# EAGLE board deltabot-heater-bed (EAGLE 6.2)
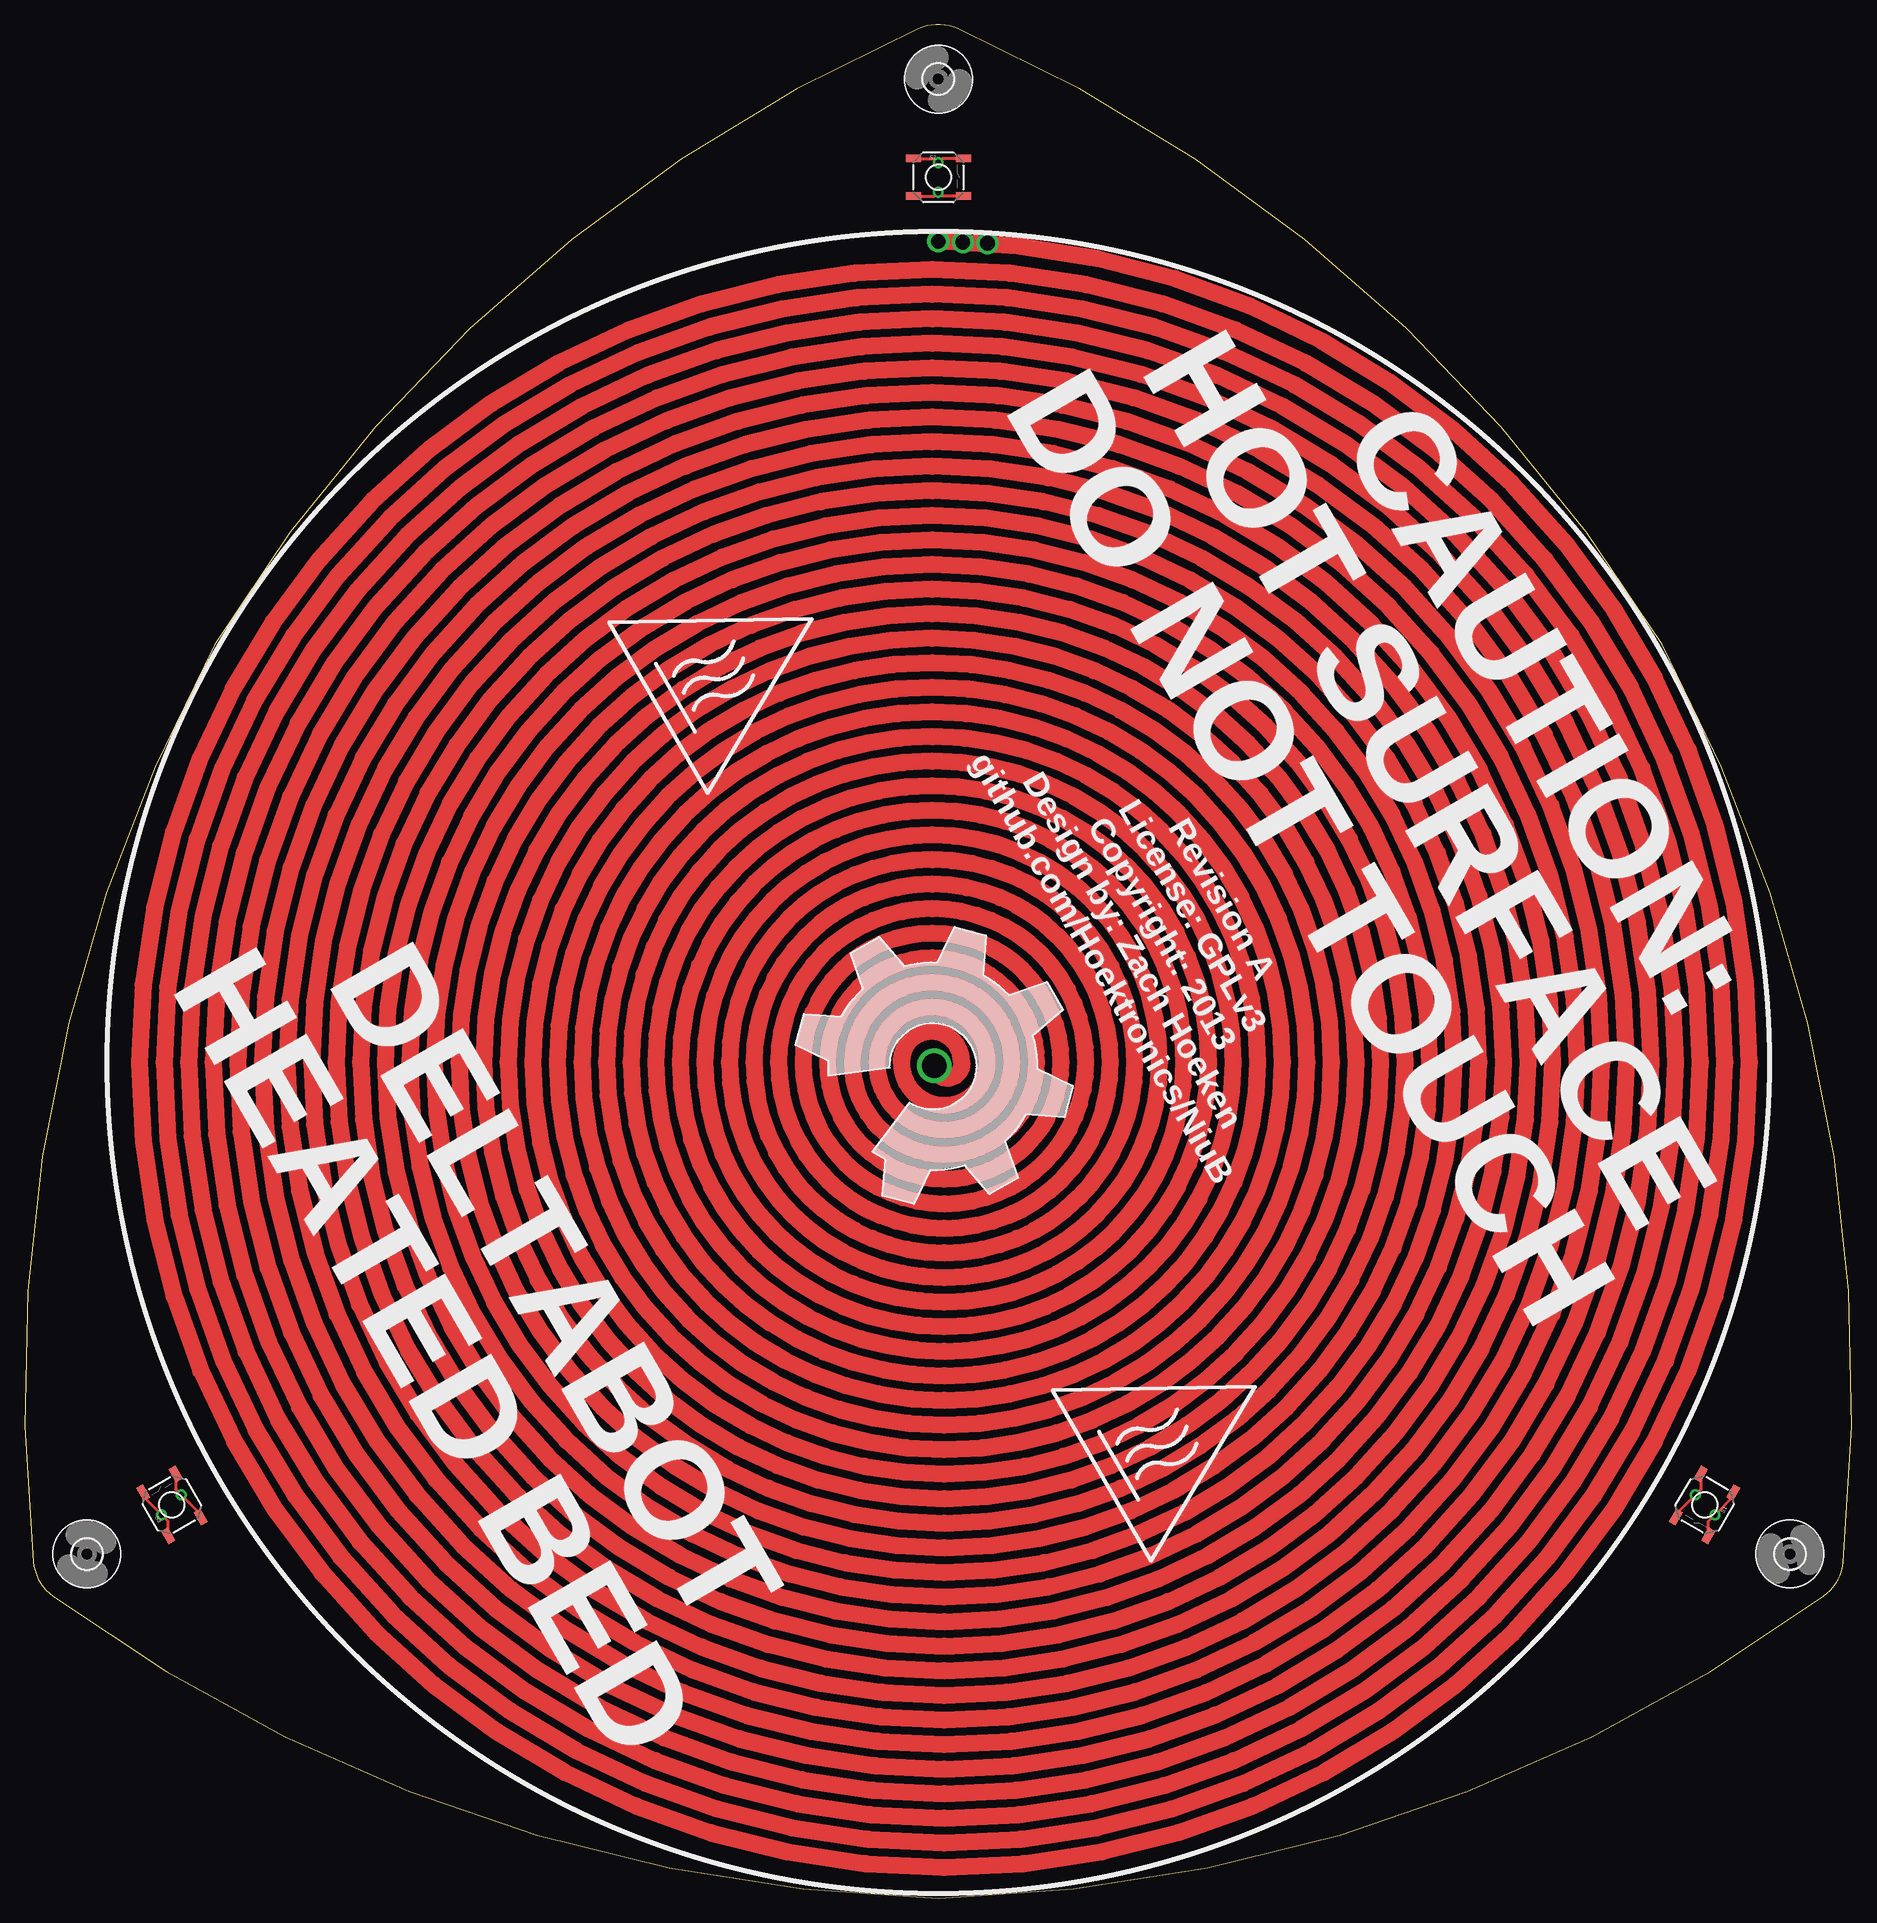
[diagram p0: board, top side]
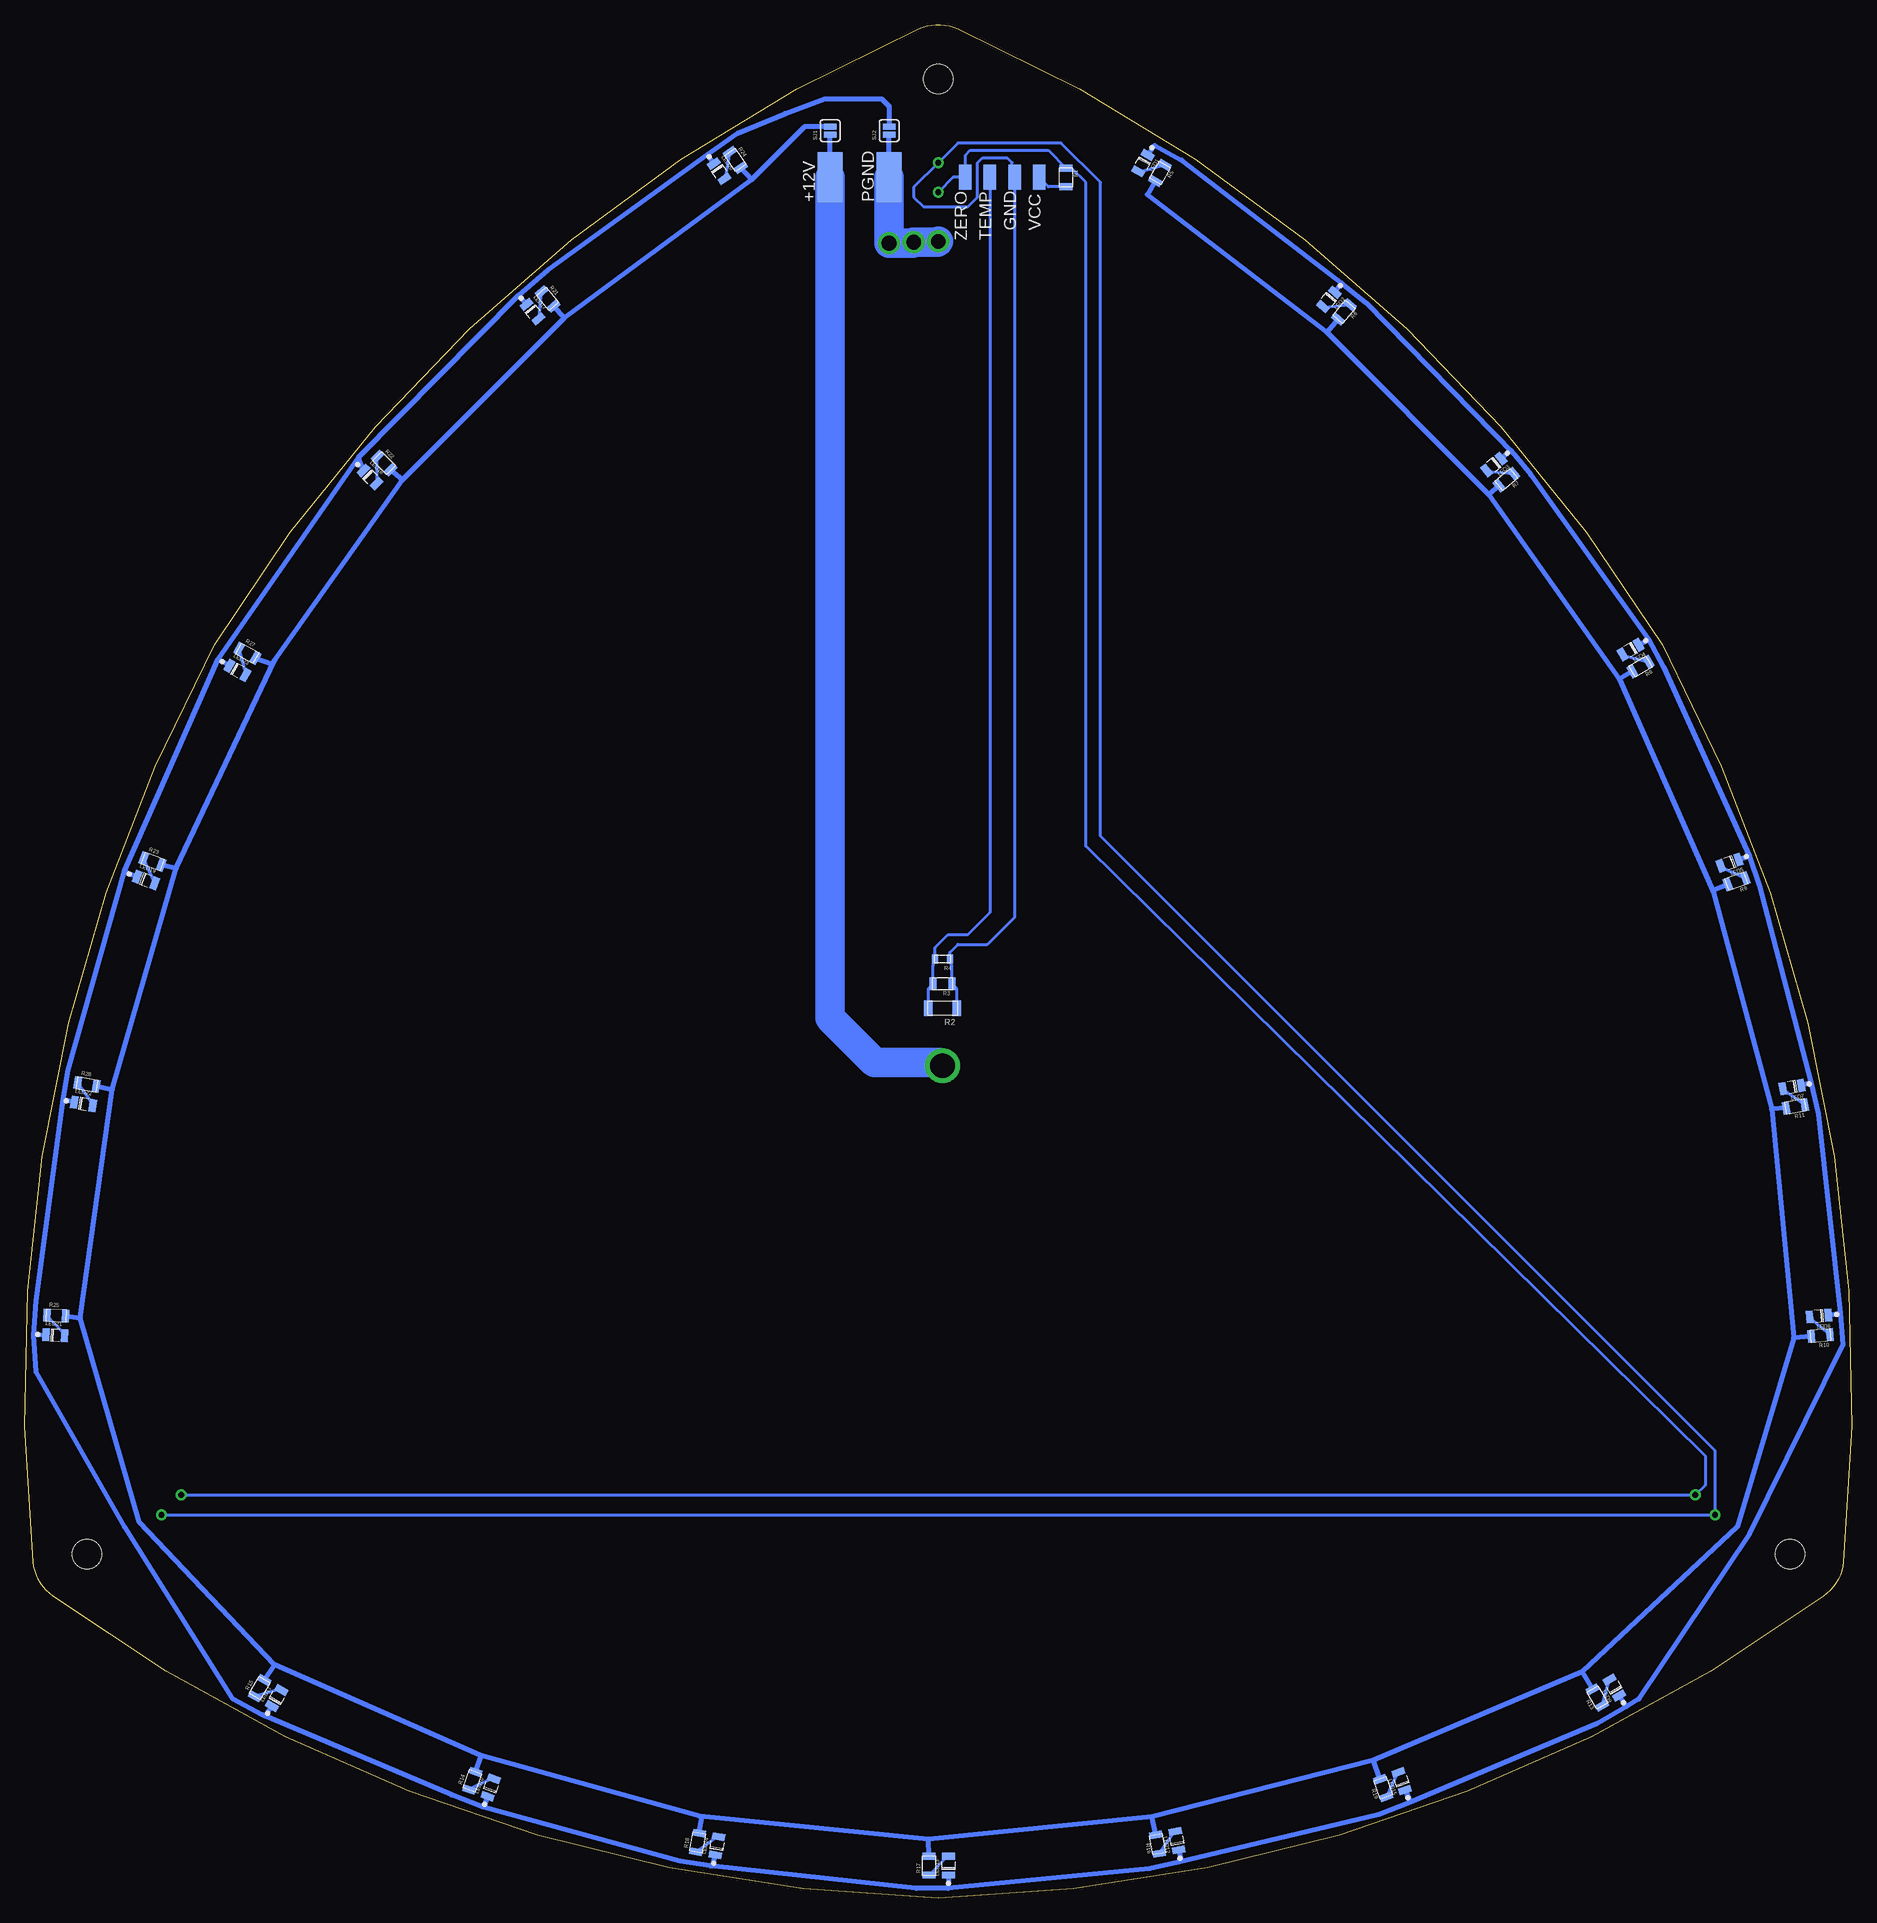
[diagram p1: board, bottom side, seen from below]

Size 185.85 x 190.54 mm. Coordinates in mm from the lower left corner, seen from the top.
Outline: 19.31,127.5 arc35 0.88,34.19
Outline: 2.9,30.69 arc35 92.93,0
Outline: 0.88,34.19 arc48 2.9,30.69
Outline: 166.54,127.5 arc35 94.95,190.12
Outline: 90.9,190.12 arc35 19.31,127.5
Outline: 94.95,190.12 arc48 90.9,190.12
Outline: 184.97,34.19 arc35 166.54,127.5
Outline: 92.93,0 arc35 182.95,30.69
Outline: 182.95,30.69 arc48 184.97,34.19
Outline: 19.31,127.5 arc35 0.88,34.19
Outline: 2.9,30.69 arc35 92.93,0
Outline: 0.88,34.19 arc48 2.9,30.69
Outline: 166.54,127.5 arc35 94.95,190.12
Outline: 90.9,190.12 arc35 19.31,127.5
Outline: 94.95,190.12 arc48 90.9,190.12
Outline: 184.97,34.19 arc35 166.54,127.5
Outline: 92.93,0 arc35 182.95,30.69
Outline: 182.95,30.69 arc48 184.97,34.19
Copper layers (1*16): Top 0.035mm / dielectric 1.5mm / Bottom 0.035mm
Design rules: minimum track width 8mil, minimum drill 20mil, track to track 8mil, track to pad 8mil, pad to pad 8mil, via to via 8mil, smd to smd 8mil, copper to edge 10mil, drill to drill 8mil, minimum pad ring 12mil, minimum via ring 10mil, stop-mask expansion 4mil, vias tented up to drill 100mil, thermal gap 10mil

## Footprints (pad centres in the part's own frame; a part is rotated, then mirrored left to right if it is on the bottom)
SMD2,54-5,08 = smd 2.54 x 5.08: 1 0,0
SMD1,27-2,54 = smd 1.27 x 2.54: 1 0,0
3,0 = hole 3: 0,0
0805-LED = smd 0.7 x 1.3: A 0.95,0; C -0.95,0
0805-RC = smd 0.7 x 1.3: 1 -0.95,0; 2 0.95,0
1206-RC = smd 0.9 x 1.6: 1 -1.45,0; 2. 1.45,0
0603-RC = smd 0.6 x 0.9: 1 -0.75,0; 2 0.75,0
TACTILE_SWITCH_SMD = smd 1.524 x 0.762: 1 -2.54,1.905; 2 2.54,1.905; 3 -2.54,-1.905; 4 2.54,-1.905
SJ_2S = smd 0.635 x 1.27: 1 -0.412,0; 2 0.412,0

## Placement (x,y rotation side)
+12V  WIREPADSMD2,54-5,08  [SMD2,54-5,08]  103.93,175 0 bottom
GND  [SMD1,27-2,54]  85.18,175 0 bottom
H1  MOUNT-HOLE3.0  [3,0]  179.53,35 330 top
H2  MOUNT-HOLE3.0  [3,0]  6.32,35 210 top
H3  MOUNT-HOLE3.0  [3,0]  92.93,185 90 top
LED1  [0805-LED]  72.1,176.45 240 bottom
LED2  [0805-LED]  53.19,162.6 230 bottom
LED3  [0805-LED]  36.43,145.8 220 bottom
LED4  [0805-LED]  22.51,126.98 210 bottom
LED5  [0805-LED]  12.44,105.3 200 bottom
LED6  [0805-LED]  3.36,59.2 185 bottom
LED7  [0805-LED]  6.1,82.48 190 bottom
LED9  [0805-LED]  24.17,21.41 120 bottom
LED10  [0805-LED]  138.44,11.25 70 bottom
LED11  [0805-LED]  160.22,20.35 60 bottom
LED12  [0805-LED]  68.65,5.84 100 bottom
LED13  [0805-LED]  91.88,3.3 90 bottom
LED14  [0805-LED]  115.44,5.33 80 bottom
LED15  [0805-LED]  45.8,11.89 110 bottom
LED17  [0805-LED]  134.19,161.36 310 bottom
LED18  [0805-LED]  150.71,144.53 315 bottom
LED19  [0805-LED]  173.52,103.54 340 bottom
LED20  [0805-LED]  115.21,175.63 305 bottom
LED21  [0805-LED]  182.72,57.25 357.5 bottom
LED22  [0805-LED]  179.86,80.77 350 bottom
LED23  [0805-LED]  164.21,124.87 330 bottom
LOGO1  OSHW_LOGO_FILLX1000-NT  [OSHW_FILLX1000_NOTEXT]  75.72,91.35 300 top
PGND  WIREPADSMD2,54-5,08  [SMD2,54-5,08]  97.93,175 0 bottom
R1  10k  [0805-RC]  79.93,175 270 bottom
R2  [1206-RC]  92.5,90.5 180 bottom
R3  [0805-RC]  92.5,93 180 bottom
R4  [0603-RC]  92.5,95.5 180 bottom
R5  [0805-RC]  70.37,175.45 240 bottom
R6  [0805-RC]  51.66,161.31 230 bottom
R7  [0805-RC]  35.14,144.27 220 bottom
R8  [0805-RC]  21.51,125.24 210 bottom
R9  [0805-RC]  11.75,103.42 200 bottom
R10  [0805-RC]  3.19,57.21 185 bottom
R11  [0805-RC]  5.75,80.52 190 bottom
R13  [0805-RC]  25.9,20.41 120 bottom
R14  [0805-RC]  140.32,11.94 70 bottom
R15  [0805-RC]  161.95,21.35 60 bottom
R16  [0805-RC]  70.62,5.49 100 bottom
R17  [0805-RC]  93.88,3.3 90 bottom
R18  [0805-RC]  117.41,5.67 80 bottom
R19  [0805-RC]  47.68,11.2 110 bottom
R21  [0805-RC]  132.66,162.64 310 bottom
R22  [0805-RC]  149.3,145.94 315 bottom
R23  [0805-RC]  172.84,105.42 340 bottom
R24  [0805-RC]  113.57,176.78 305 bottom
R25  [0805-RC]  182.63,59.25 357.5 bottom
R26  [0805-RC]  179.51,82.74 350 bottom
R27  [0805-RC]  163.21,126.6 330 bottom
S1  [TACTILE_SWITCH_SMD]  170.87,40 240 top
S2  [TACTILE_SWITCH_SMD]  92.93,175 0 top
S3  [TACTILE_SWITCH_SMD]  14.98,40 120 top
SJ1  SOLDERJUMPERNC  [SJ_2S]  103.93,179.75 90 bottom
SJ2  SOLDERJUMPERNC  [SJ_2S]  97.93,179.75 90 bottom
TEMP  [SMD1,27-2,54]  87.68,175 0 bottom
VCC  [SMD1,27-2,54]  82.68,175 0 bottom
ZERO  [SMD1,27-2,54]  90.18,175 0 bottom

## Library data of the parts
+12V GND PGND TEMP VCC ZERO = wirepad
H1-H3 = holes
LED1-LED7 LED9-LED15 LED17-LED23 R1-R11 R13-R19 R21-R27 = Hoektronics
LOGO1 = ohw-logo
S1-S3 = SparkFun-Electromechanical; PROD_ID: SWCH-08247
SJ1 SJ2 = SparkFun-Passives

## Nets
12V: R5.2 R6.2 R7.2 R8.2 R9.2 R10.2 R11.2 R13.2 R14.2 R15.2 R16.2 R17.2 R18.2 R19.2 R21.2 R22.2 R23.2 R24.2 R25.2 R26.2 R27.2 SJ1.2
GND: GND.1 R2.1 R3.1 R4.1 S1.1 S1.2 S2.1 S2.2 S3.1 S3.2
HEATER: +12V.1 PGND.1 SJ1.1 SJ2.1
N$1: R2.2. R3.2 R4.2 TEMP.1
N$2: LED1.A R5.1
N$3: LED2.A R6.1
N$4: R1.1 S1.3 S1.4 S2.3 S2.4 S3.3 S3.4 ZERO.1
N$5: LED3.A R7.1
N$6: LED4.A R8.1
N$7: LED5.A R9.1
N$8: LED6.A R10.1
N$9: LED7.A R11.1
N$11: LED9.A R13.1
N$12: LED10.A R14.1
N$13: LED11.A R15.1
N$14: LED12.A R16.1
N$15: LED13.A R17.1
N$16: LED14.A R18.1
N$17: LED15.A R19.1
N$19: LED17.A R21.1
N$20: LED18.A R22.1
N$21: LED19.A R23.1
N$22: LED20.A R24.1
N$23: LED21.A R25.1
N$24: LED22.A R26.1
N$25: LED23.A R27.1
PGND: LED1.C LED2.C LED3.C LED4.C LED5.C LED6.C LED7.C LED9.C LED10.C LED11.C LED12.C LED13.C LED14.C LED15.C LED17.C LED18.C LED19.C LED20.C LED21.C LED22.C LED23.C SJ2.2
VCC: R1.2 VCC.1

## Tracks (layer width: path | path; a pad name or v marks a point on that pad's centre or on a via)
12V
  Bottom 0.5: R24.2 111.93,174.75 | 111.93,174.75 130.93,160.75 | 130.93,160.75 R21.2 | R22.2 147.43,144.25 | 147.43,144.25 130.93,160.75 | R27.2 160.68,125.5 160.39,125.9 | 160.39,125.9 147.43,144.25 | R23.2 170.43,104.75 | 170.43,104.75 160.39,125.9 | R26.2 176.93,82.25 | 176.93,82.25 170.43,104.75 | R25.2 180.18,59 | 180.18,59 176.93,82.25 | R15.2 160.43,23.75 | 160.43,23.75 174.18,38.25 180.18,59 | R14.2 139.43,14.5 139.52,14.54 | 139.52,14.54 160.43,23.75 | R18.2 116.93,8.25 117.16,8.31 | 117.16,8.31 139.52,14.54 | R17.2 93.93,6 | 93.93,6 117.16,8.31 | R16.2 71.18,8.25 | 71.18,8.25 93.93,6 | R19.2 48.68,14 | 48.68,14 71.18,8.25 | R13.2 27.43,23 | 27.43,23 48.68,14 | R10.2 5.93,57 | 5.93,57 11.68,37.75 27.43,23 | R11.2 8.18,80.25 | 8.18,80.25 5.93,57 | R9.2 14.18,102.5 14.13,102.33 | 14.13,102.33 8.18,80.25 | R8.2 23.68,124 | 23.68,124 14.13,102.33 | R7.2 36.93,142.75 | 36.93,142.75 23.68,124 | R6.2 53.43,159.25 | 53.43,159.25 36.93,142.75 | R5.2 71.68,173.25 53.43,159.25 | 111.93,174.75 106.51,180.16 SJ1.2
GND  (via drill 0.6)
  Top 0.3: S1.1 173.79,40.86 v171.93,39 171.25,38.32 S1.2 | S3.1 14.6,38.32 v13.93,39 12.06,40.86 S3.2 | S2.2 93.33,176.91 v92.93,176.5 92.52,176.91 S2.1
  Bottom 0.3: R2.1 91.05,92.5 R3.1 91.55,94.8 R4.1 91.75,96.18 90.93,97 87.93,97 85.18,99.75 GND.1 85.43,175.75 85.43,176.5 85.93,177 88.43,177 88.93,176.5 88.93,173 89.93,172 94.43,172 95.43,173 95.43,174 v92.93,176.5 90.93,178.5 80.43,178.5 76.43,174.5 76.43,108 13.93,45.5 v13.93,39 v171.93,39
HEATER  (via drill 1.5 pad 2.25, 2.5 pad 3)
  Top 1.75: v92.93,168.5 arc-90 175.43,85 arc-180 11.68,85 arc-180 172.93,85 arc-180 14.18,85 arc-180 170.43,85 arc-180 16.68,85 arc-180 167.93,85 arc-180 19.18,85 arc-180 165.43,85 arc-180 21.68,85 arc-180 162.93,85 arc-180 24.18,85 arc-180 160.43,85 arc-180 26.68,85 arc-180 157.93,85 arc-180 29.18,85 arc-180 155.43,85 arc-180 31.68,85 arc-180 152.93,85 arc-180 34.18,85 arc-180 150.43,85 arc-180 36.68,85 arc-180 147.93,85 arc-180 39.18,85 arc-180 145.43,85 arc-180 41.68,85 arc-180 142.93,85 arc-180 44.18,85 arc-180 140.43,85 arc-180 46.68,85 arc-180 137.93,85 arc-180 49.18,85 arc-180 135.43,85 arc-180 51.68,85 arc-180 132.93,85 arc-180 54.18,85 arc-180 130.43,85 arc-180 56.68,85 arc-180 127.93,85 arc-180 59.18,85 arc-180 125.43,85 arc-180 61.68,85 arc-180 122.93,85 arc-180 64.18,85 arc-180 120.43,85 arc-180 66.68,85 arc-180 117.93,85 arc-180 69.18,85 arc-180 115.43,85 arc-180 71.68,85 arc-180 112.93,85 arc-180 74.18,85 arc-180 110.43,85 arc-180 76.68,85 arc-180 107.93,85 arc-180 79.18,85 arc-180 105.43,85 arc-180 81.68,85 arc-180 102.93,85 arc-180 84.18,85 arc-180 100.43,85 arc-180 86.68,85 arc-180 97.93,85 arc-180 89.18,85 arc-180 95.28,85.2 arc-190 92.43,84.75 92.5,84.68 v92.5,84.65
  Bottom 0.5: +12V.1 SJ1.1 | PGND.1 SJ2.1
  Bottom 3: PGND.1 v97.93,168.3 95.53,168.3 v95.43,168.4 93.03,168.4 v92.93,168.5 | +12V.1 103.93,89.5 99.43,85 92.85,85 v92.5,84.65
N$1
  Bottom 0.3: TEMP.1 87.68,100.25 89.93,98 91.93,98 93.25,96.68 R4.2 93.45,94.8 R3.2 93.95,92.5 R2.2.
N$2
  Bottom 0.3: LED1.A 72.49,175.58 R5.1
N$3
  Bottom 0.3: LED2.A 53.73,161.81 R6.1
N$4  (via drill 0.6)
  Top 0.3: 89.83,173.09 S2.3 92.52,173.09 v92.93,173.5 93.33,173.09 S2.4 | 170.49,43.56 S1.3 170.49,41.56 v169.93,41 167.95,39.02 S1.4 | S3.3 17.9,39.02 v15.93,41 15.36,41.56 S3.4
  Bottom 0.3: v169.93,41 v15.93,41 14.93,42 14.93,45 77.93,107 77.93,174.5 79.38,175.95 R1.1 81.73,177.75 89.68,177.75 90.18,177.25 ZERO.1 91.43,175 v92.93,173.5
N$5
  Bottom 0.3: LED3.A 37.09,145.11 R7.1
N$6
  Bottom 0.3: LED4.A 23.28,126.41 R8.1
N$7
  Bottom 0.3: LED5.A 13.3,104.89 R9.1
N$8
  Bottom 0.3: LED6.A 4.3,59.02 R10.1
N$9
  Bottom 0.3: LED7.A 7.02,82.22 R11.1
N$11
  Bottom 0.3: LED9.A 24.73,22.18 R13.1
N$12
  Bottom 0.3: LED10.A 138.2,12.18 R14.1
N$13
  Bottom 0.3: LED11.A 159.83,21.22 R15.1
N$14
  Bottom 0.3: LED12.A 68.91,6.76 R16.1
N$15
  Bottom 0.3: LED13.A 91.98,4.25 R17.1
N$16
  Bottom 0.3: LED14.A 115.37,6.28 R18.1
N$17
  Bottom 0.3: LED15.A 46.22,12.75 R19.1
N$19
  Bottom 0.3: LED17.A 133.5,160.69 R21.1
N$20
  Bottom 0.3: LED18.A 149.97,143.93 R22.1
N$21
  Bottom 0.3: LED19.A 172.59,103.31 R23.1
N$22
  Bottom 0.3: LED20.A 114.58,174.91 R24.1
N$23
  Bottom 0.3: LED21.A 181.77,57.31 R25.1
N$24
  Bottom 0.3: LED22.A 178.9,80.71 R26.1
N$25
  Bottom 0.3: LED23.A 163.33,124.48 R27.1
PGND
  Bottom 0.3: LED4.C 21.64,127.36
  Bottom 0.5: 116.43,177.3 LED20.C 116.33,177.2 | 116.43,177.3 113.33,179.5 108.53,181.5 104.43,183 98.68,183 97.93,182.25 SJ2.2 | LED17.C 135.63,163 | 135.63,163 132.63,165.6 116.43,177.3 | LED18.C 151.93,146.5 151.8,146.63 | 151.8,146.63 135.63,163 | LED23.C 166.18,126 | 166.18,126 151.8,146.63 | LED19.C 175.43,104.25 175.68,104.5 | 175.68,104.5 166.18,126 | LED22.C 181.93,81.25 | 181.93,81.25 181.43,84.25 175.68,104.5 | LED21.C 184.93,57.25 | 184.93,57.25 184.68,60.75 181.93,81.25 | LED11.C 161.43,18.5 161.71,18.65 | 161.71,18.65 164.68,20.25 175.68,37.75 184.68,53.5 184.93,57.25 | LED10.C 139.18,9.25 | 139.18,9.25 142.43,10.5 161.71,18.65 | LED14.C 115.93,3.25 116.13,3.28 | 116.13,3.28 119.18,3.75 139.18,9.25 | LED13.C 91.93,1 | 91.93,1 95.18,1 116.13,3.28 | LED12.C 68.18,3.75 68.52,3.67 | 68.52,3.67 71.43,3 91.93,1 | LED15.C 44.93,9.75 | 44.93,9.75 48.18,8.5 68.52,3.67 | LED9.C 22.93,19.5 | 22.93,19.5 25.93,17.75 44.93,9.75 | LED6.C 1.18,59.5 | 1.18,59.5 0.93,56.25 10.43,37 21.68,20.25 22.93,19.5 | LED7.C 4.18,83 | 4.18,83 3.43,79.75 1.18,59.5 | LED5.C 10.43,106 | 10.43,106 9.43,103 4.18,83 | LED4.C 20.68,128 | 20.68,128 19.18,125.25 10.43,106 | LED3.C 34.68,147.25 34.33,146.82 | 34.33,146.82 32.68,144.75 20.68,128 | LED2.C 51.93,164.25 51.77,164.13 | 51.77,164.13 49.43,162.25 34.33,146.82 | LED1.C 70.93,178.25 68.18,176.75 51.77,164.13
VCC
  Bottom 0.3: R1.2 81.73,174.05 VCC.1

## Text on the board
tPlace: CAUTION: | HOT SURFACE | DO NOT TOUCH | Revision A | License: GPLv3 | Copyright: 2013 | Design by: Zach Hoeken | github.com/Hoektronics/NiuB | DELTABOT | HEATED BED
Document: --------------------------------------------------------------------------------------------------------------------------------------------------------------------------------------------- | --------------------------------------------------------------------------------------------------------------------------------------------------------------------------------------------- | ---------------------------------------------------------------------------------------------------------------------------------------------------------------------------------------------